# Altium PCB solder_glitcher.PcbDoc
Units mil, origin at the board's own origin, x right, y up, seen from the top; angles counter-clockwise.
Board outline 5000 x 4000 mil, 2 copper layers (Top Layer, Bottom Layer); 72 components, 60 nets, 315 pads, 5 vias.
Unrouted connection lines stored in the file: 2.
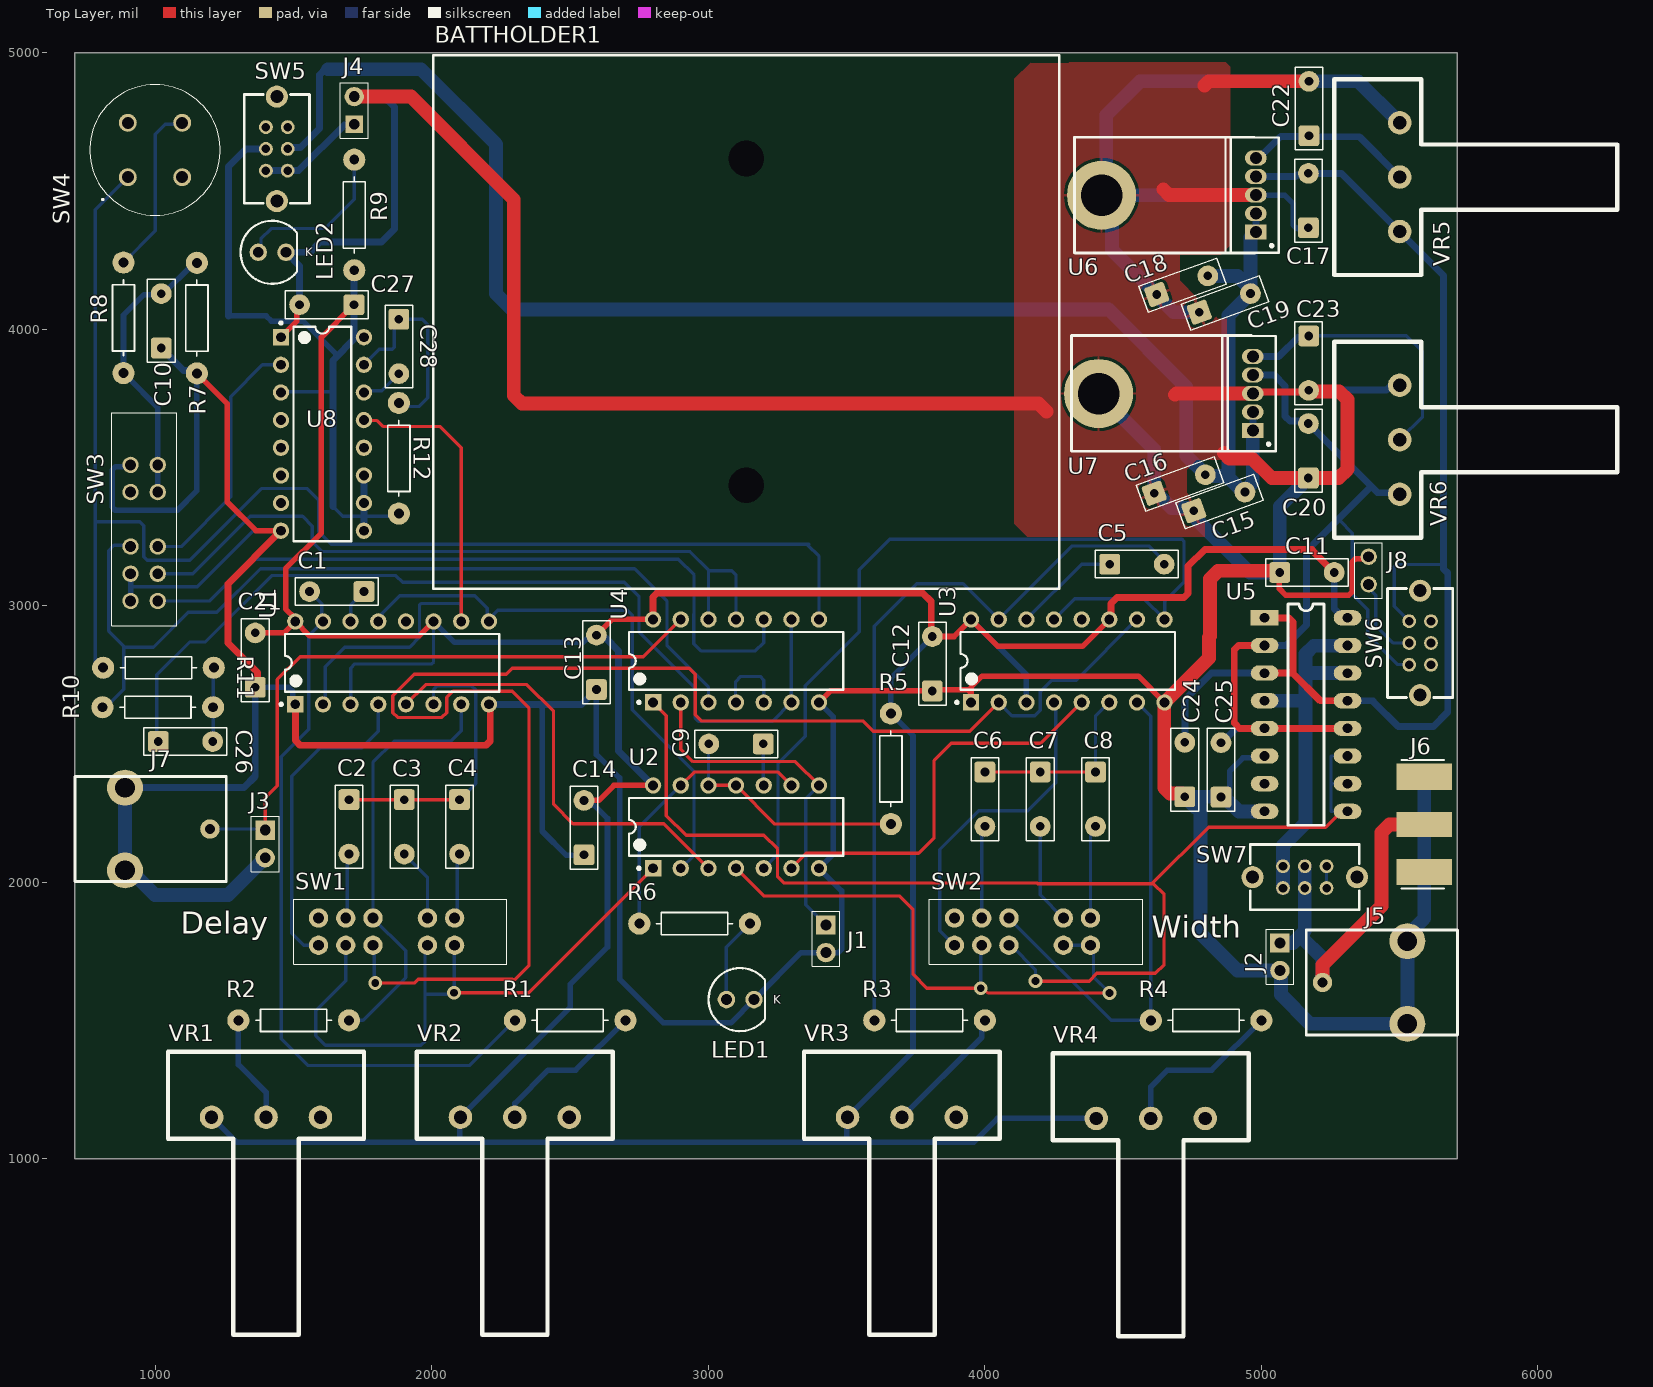
[diagram p0: Top Layer view]
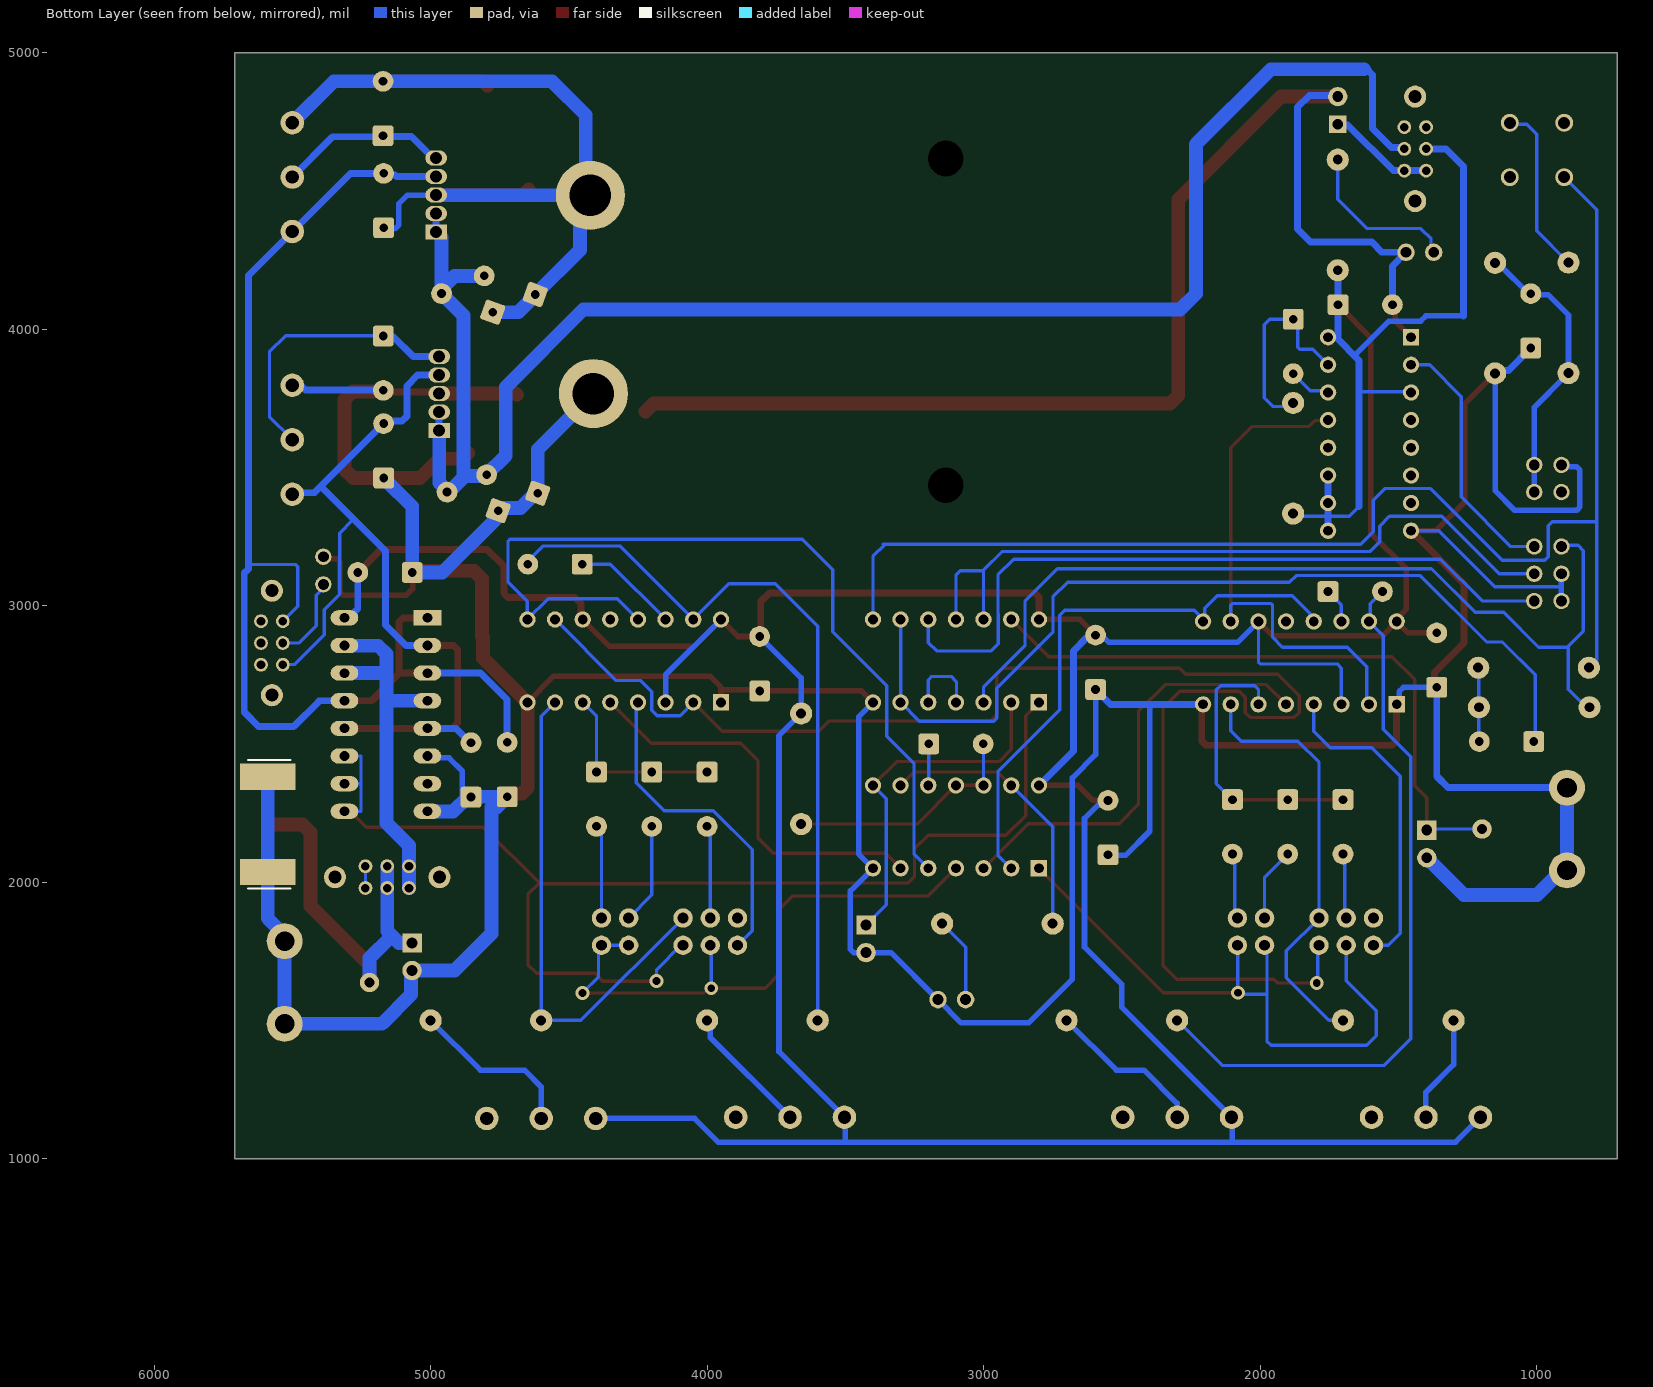
[diagram p1: Bottom Layer view, seen from below]
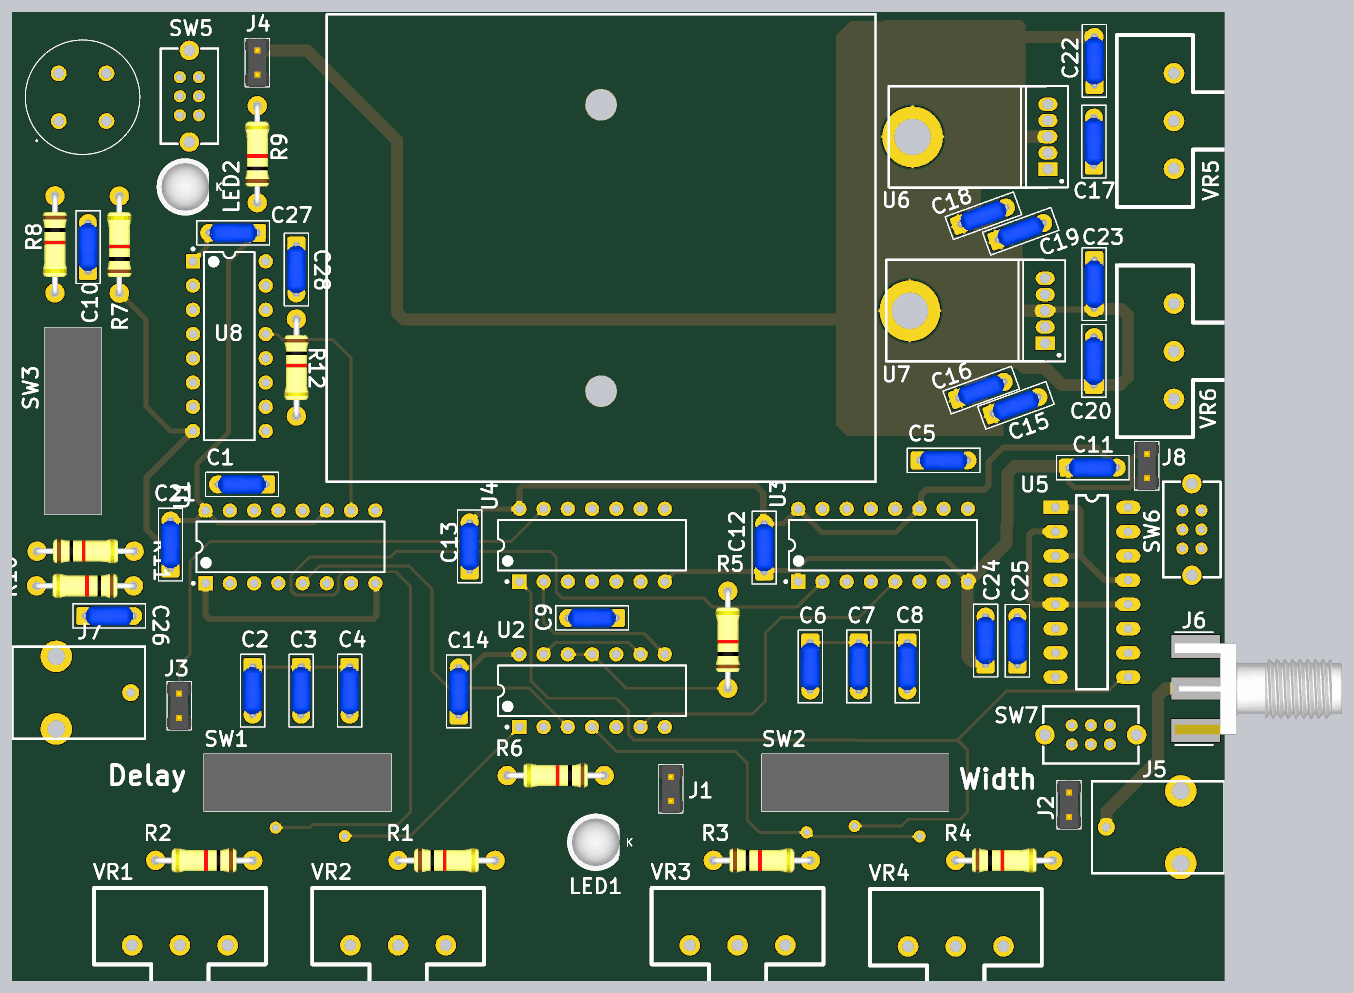
[diagram p2: 3D render of the assembled board from above, using the file's embedded part models]

## Layer stack, top to bottom
Top Solder: solder mask 0.4, Solder Resist, Dk 3.5
Top Layer: signal copper 1.4
Dielectric 1: dielectric 12.6, FR-4, Dk 4.8
Bottom Layer: signal copper 1.4
Bottom Solder: solder mask 0.4, Solder Resist, Dk 3.5

## Board outline
707.87,1000 5707.87,1000 5707.87,5000 707.87,5000

## Design rules (kind name [scope] priority, off if disabled: settings)
BoardOutlineClearance Silk_to_Outline [(OnLayer('Top Overlay'))] p1: gap=0 ignorepadtopadclearanceinfootprint=FALSE
BoardOutlineClearance [All] p2: gap=20 ignorepadtopadclearanceinfootprint=FALSE
Clearance Clearance_Power [InNet('+*') OR InNet('-*') OR InNet('GND')  OR InNet('VCC')] p1: gap=12 ignorepadtopadclearanceinfootprint=FALSE
Clearance [All] p2: gap=12 ignorepadtopadclearanceinfootprint=FALSE except(0: Arc-Hole Track-Hole SMDPad-Hole THPad-Hole Via-Hole Fill-Hole Poly-Hole Region-Hole Text-Hole)
HoleSize [All] p1: absolutevalues=TRUE maxlimit=200 minlimit=1 maxpercent=80.000 minpercent=20.000
MinimumSolderMaskSliver [All] p1: minsoldermaskwidth=5
PlaneConnect PlaneConnect_viaDirect [IsVia] p1: planeconnectstyle=Direct reliefexpansion=20 reliefentries=4 reliefconductorwidth=10 reliefairgap=10
PlaneConnect [All] p2: planeconnectstyle=Relief reliefexpansion=20 reliefentries=4 reliefconductorwidth=10 reliefairgap=10
PolygonConnect PolygonConnect_viaDirect [All vs isVia] p1: connectstyle=Direct reliefconductorwidth=10 reliefentries=4 polygonreliefangle="90 Angle" airgapwidth=10
PolygonConnect [All] p2: connectstyle=Relief reliefconductorwidth=10 reliefentries=4 polygonreliefangle="90 Angle" airgapwidth=10
RoutingVias [All] p1: holewidth=28 width=50 viastyle="Through Hole" minholewidth=28 minwidth=50 maxholewidth=28 maxwidth=50
SilkToSilkClearance [All] p1: silktosilkclearance=5
SilkToSolderMaskClearance [IsPad] p1: minsilkscreentomaskgap=5 clearancetoexposedcopper=TRUE
SolderMaskExpansion [All] p1: expansion=4 istentingtop=FALSE
Width Width_Power [InNet('+*') OR InNet('-*') OR InNet('GND')  OR InNet('VCC')] p1: maxlimit=100 minlimit=10 preferedwidth=20 minimp=50.000000 maximp=50.000000 favimp=50.000000
Width [All] p2: maxlimit=100 minlimit=6 preferedwidth=12 minimp=50.000000 maximp=50.000000 favimp=50.000000
25 further rules are at their usual default settings.

## Classes and differential pairs
component class inputs: C10 C26 C27 C28 J3 J7 R7 R8 R10 R11 R12 SW3 SW4 U8
component class power: C15 C16 C17 C18 C19 C20 C22 C23 J4 J8 LED2 R9 SW5 SW6 U6 U7 VR5 VR6
component class output_driver: C9 C11 C12 C13 C14 C21 C24 C25 J1 J2 J5 J6 LED1 R5 R6 SW7 U4 U5
component class delay_width: C1 C2 C3 C4 C5 C6 C7 C8 R1 R2 R3 R4 SW1 SW2 U1 U2 U3 VR1 VR2 VR3 VR4

## Components (designator, comment, footprint, x,y, rotation, side; value= is the part's Value field where it differs from the comment)
BATTHOLDER1 "Comment" MPD_AAHOLDER_BC3AAW 3137,4026 r0 top
C1 "approved sub OK" CAPC500P450250X550 1656,3051 r180 top value=22pF
C2 "approved sub OK" CAPC500P450250X550 1700,2200 r270 top value=330pF
C3 "approved sub OK" CAPC500P450250X550 1900,2200 r270 top value=10nF
C4 "approved sub OK" CAPC500P450250X550 2100,2200 r270 top value=330nF
C5 "approved sub OK" CAPC500P450250X550 4550,3150 r0 top value=22pF
C6 "approved sub OK" CAPC500P450250X550 4000,2300 r270 top value=330pF
C7 "approved sub OK" CAPC500P450250X550 4200,2300 r270 top value=10nF
C8 "approved sub OK" CAPC500P450250X550 4400,2300 r270 top value=330nF
C9 "approved sub OK" CAPC500P450250X550 3100,2500 r180 top value=470nF
C10 "approved sub OK" CAPC500P450250X550 1021,4030 r90 top value=1nF
C11 "approved sub OK" CAPC500P450250X550 5165,3120 r0 top value=100nF
C12 "approved sub OK" CAPC500P450250X550 3810,2790 r90 top value=100nF
C13 "approved sub OK" CAPC500P450250X550 2595,2795 r90 top value=100nF
C14 "approved sub OK" CAPC500P450250X550 2550,2197 r90 top value=100nF
C15 "approved sub OK" CAPC500P450250X550 4848,3377 r20 top value=100n
C16 "approved sub OK" CAPC500P450250X550 4705,3440 r20 top value=6u8
C17 "approved sub OK" CAPC500P450250X550 5170,4465 r90 top value=2u2
C18 "approved sub OK" CAPC500P450250X550 4714,4159 r20 top value=100n
C19 "approved sub OK" CAPC500P450250X550 4868,4095 r20 top value=6u8
C20 "approved sub OK" CAPC500P450250X550 5170,3560 r90 top value=2u2
C21 "approved sub OK" CAPC500P450250X550 1361,2803 r90 top value=100nF
C22 "approved sub OK" CAPC500P450250X550 5172,4798 r90 top value=1nF
C23 "approved sub OK" CAPC500P450250X550 5171,3877 r270 top value=1nF
C24 "approved sub OK" CAPC500P450250X550 4723,2407 r90 top value=470nF
C25 "approved sub OK" CAPC500P450250X550 4854,2406 r90 top value=470nF
C26 "approved sub OK" CAPC500P450250X550 1108.52,2508.45 r0 top value=100nF
C27 "approved sub OK" CAPC500P450250X550 1619.66,4088.53 r180 top value=100nF
C28 "approved sub OK" CAPC500P450250X550 1880.37,3937.36 r270 top value=330nF
J1 "Jumper" 2x2.54mm_Header#1 3425,1845 r270 top
J2 "Jumper" 2x2.54mm_Header#1 5067,1780 r270 top
J3 "Jumper" 2x2.54mm_Header#1 1397,2188 r270 top
J4 "Jumper" 2x2.54mm_Header#2 1719,4741 r90 top
J5 "73171-3150" 73171-3150 5221,1637 r90 top
J6 "CON-SMA-PCBEDGE-003.062" CON-SMAM-PCB-EDGE062 5589,2209 r0 top
J7 "73171-3150" 73171-3150 1197,2192 r270 top
J8 "Jumper" 2x2.54mm_Header#3 5388,3077 r90 top
LED1 "151053GS03000" "Type 5mm" 3115,1575 r0 top
LED2 "151053GS03000" "Type 5mm" 1422,4278 r0 top
R1 "Carbon Film" RESTH_AXIAL-0.4 2500,1500 r0 top value=300R
R2 "Carbon Film" RESTH_AXIAL-0.4 1500,1500 r180 top value=300R
R3 "Carbon Film" RESTH_AXIAL-0.4 3800,1500 r0 top value=300R
R4 "Carbon Film" RESTH_AXIAL-0.4 4800,1500 r0 top value=300R
R5 "Carbon Film" RESTH_AXIAL-0.4 3660,2410 r90 top value=220K
R6 "Carbon Film" RESTH_AXIAL-0.4 2950,1850 r180 top value=330R
R7 "Carbon Film" RESTH_AXIAL-0.4 1150,4039.98 r90 top value=220K
R8 "Carbon Film" RESTH_AXIAL-0.4 884.48,4041.01 r270 top value=1K
R9 "Carbon Film" RESTH_AXIAL-0.4 1719,4413 r90 top value=330R
R10 "Carbon Film" RESTH_AXIAL-0.4 1008.48,2632.5 r180 top value=220K
R11 "Carbon Film" RESTH_AXIAL-0.4 1011,2775.48 r0 top value=220K
R12 "Carbon Film" RESTH_AXIAL-0.4 1880.48,3533 r270 top value=22K
SW1 "SS-24E06-TG 5 (P)" CK_SS24E06TG5P#1 1500,1700 r0 top
SW2 "SS-24E06-TG 5 (P)" CK_SS24E06TG5P#1 3800,1700 r0 top
SW3 "SS-24E06-TG 5 (P)" CK_SS24E06TG5P#2 1079.99,2927 r90 top
SW4 "D6C50F1LFS" D6C50F1LFS 900,4549.5 r90 top
SW5 "EG2207" EG2207 1439,4652 r90 top
SW6 "EG2207" EG2207 5574,2865 r90 top
SW7 "EG2207" EG2207 5157,2018 r180 top
U1 "SN74AHC123AN" N0016A 1856,2793 r90 top
U2 "SN74HC02N" N0014A 3100,2200 r90 top
U3 "SN74AHC123AN" N0016A 4300,2800 r90 top
U4 "SN74HC14N" N0014A 3100,2800 r90 top
U5 "MAX4619" DIP16 5011.52,2956.02 r0 top
U6 "MCP1825-ADJE/AT" TO-220-AT5 4980,4485 r90 top
U7 "MCP1825-ADJE/AT" TO-220-AT5 4969,3767 r90 top
U8 "SN74AHC123AN" N0016A 1603.93,3621 r0 top
VR1 "20K" RES_PDB18 1400,1150 r0 top
VR2 "20K" RES_PDB18 2300,1150 r0 top
VR3 "20K" RES_PDB18 3700,1150 r0 top
VR4 "20K" RES_PDB18 4600,1145.28 r0 top
VR5 "20K" RES_PDB18 5500,4550 r90 top
VR6 "20K" RES_PDB18 5500,3600 r90 top

## Footprints (in the part's own frame and the unit in brackets; to place one, negate y for a bottom-side part, rotate by r counter-clockwise, add the part's x,y. Pads: shape width x height; smd on the part's side, far side on the other; paste and mask are expansions set on the pad)
2x2.54mm_Header#1 [mil]
  rect 70x70 hole 39.37: 1(0,0)
  round 70 hole 39.37: 2(100,0)
  silkscreen extent -50,-50 150,50, body extent -50,-50 150,50, height 374
2x2.54mm_Header#2 [mil]
  rect 63x63 hole 39.37: 1(0,0)
  round 70 hole 39.37: 2(100,0)
  silkscreen extent -50,-50 150,50, body extent -50,-50 150,50, height 374
2x2.54mm_Header#3 [mil]
  round 59.06 hole 39.37: 1(0,0) 2(100,0)
  silkscreen extent -50,-50 150,50, body extent -50,-50 150,50, height 374
73171-3150 [mil]
  round 70 hole 36: 1(0,0)
  round 130 hole 71: 2(-149.5,-307) 3(149.5,-307)
  silkscreen extent -190,-488 190,59
CAPC500P450250X550 [mil] "TDK FK24 radial ceramic capacitor"
  round 20 on Mech15: 0(0,0)
  rrect25% 75x75 hole 31.5: 1(-98.43,0)
  round 75 hole 31.5: 2(98.43,0)
  silkscreen extent -150,-50 150,50, body extent -110,-39 110,39, height 215
CK_SS24E06TG5P#1 [mil]
  round 70 hole 39.37: 1(90,170) 2(188.43,170) 3(286.85,170) 4(483.7,170) 5(582.13,170) 6(90,71.57) 7(188.43,71.57) 8(286.85,71.57) 9(483.7,71.57) 10(582.13,71.57)
  silkscreen extent -1,3 771,239, body extent -1,3 771,239, height 402
CK_SS24E06TG5P#2 [mil]
  round 59.06 hole 39.37: 1(90,170) 2(188.43,170) 3(286.85,170) 4(483.7,170) 5(582.13,170) 6(90,71.57) 7(188.43,71.57) 8(286.85,71.57) 9(483.7,71.57) 10(582.13,71.57)
  silkscreen extent -1,3 771,239, body extent -1,3 771,239, height 402
CON-SMAM-PCB-EDGE062 [mm] "Connector, SMA Edge Mount for 0.062\" Thick Board, 5-Lead"
  rect 5.08x2.29 smd: 1(0,0)
  rect 5.08x2.415 smd: 2(0,-4.383) 5(0,4.383)
  rect 5.08x2.415 smd far side: 3(0,-4.383) 4(0,4.383)
  silkscreen extent -2.1,-5.9 1.8,5.9, body extent -2.15,-4.8 15.3,4.72, height 4.34
D6C50F1LFS [mm]
  round 1.65 hole 1.1: 1(0,0) 2(0,-5) 3(5,-5) 4(5,0)
  silkscreen extent -3.5,-8.5 8.5,3.5
DIP16 [mil]
  rect 100x55 hole 35: 1(0,0)
  oval 100x55 hole 35: 2(0,-100) 3(0,-200) 4(0,-300) 5(0,-400) 6(0,-500) 7(0,-600) 8(0,-700) 9(300,-700) 10(300,-600) 11(300,-500) 12(300,-400) 13(300,-300) 14(300,-200) 15(300,-100) 16(300,0)
  silkscreen extent 85,-750 215,50
EG2207 [mil]
  round 50 hole 31: 1(-78.74,39.37) 2(0,39.37) 3(78.74,39.37) 4(-78.74,-39.37) 5(0,-39.37) 6(78.74,-39.37)
  round 80 hole 47: MH1(-188.98,0) MH2(188.98,0)
  silkscreen extent -197,-118 197,118
MPD_AAHOLDER_BC3AAW [mm]
  round 0 hole 3.3: MH1(0,-15) MH1(0,15)
  silkscreen extent -28.75,-24.5 28.75,24.5
N0014A [mm] "DIP, 14-Leads, Body 19.7x6.6mm, Pitch 2.54mm"
  rect 1.5x1.5 hole 0.9: 1(-3.81,7.62)
  round 1.5 hole 0.9: 2(-3.81,5.08) 3(-3.81,2.54) 4(-3.81,0) 5(-3.81,-2.54) 6(-3.81,-5.08) 7(-3.81,-7.62) 8(3.81,-7.62) 9(3.81,-5.08) 10(3.81,-2.54) 11(3.81,0) 12(3.81,2.54) 13(3.81,5.08) 14(3.81,7.62)
  silkscreen extent -3.93,-9.85 2.65,9.85, body extent -3.95,-9.85 3.95,9.85, height 5.08
N0016A [mm] "DIP, 16-Leads, Body 19.7x6.6mm, Pitch 2.54mm"
  rect 1.5x1.5 hole 0.9: 1(-3.81,8.89)
  round 1.5 hole 0.9: 2(-3.81,6.35) 3(-3.81,3.81) 4(-3.81,1.27) 5(-3.81,-1.27) 6(-3.81,-3.81) 7(-3.81,-6.35) 8(-3.81,-8.89) 9(3.81,-8.89) 10(3.81,-6.35) 11(3.81,-3.81) 12(3.81,-1.27) 13(3.81,1.27) 14(3.81,3.81) 15(3.81,6.35) 16(3.81,8.89)
  silkscreen extent -3.93,-9.85 2.65,10.31, body extent -3.95,-9.85 3.95,9.85, height 5.08
RES_PDB18 [mil]
  round 85 hole 48: 1(-196.85,0) 2(0,0) 3(196.85,0)
  silkscreen extent -354,-787 354,236
RESTH_AXIAL-0.4 [mil]
  round 80 hole 36: 1(-200,0) 2(200,0)
  silkscreen extent -138,-40 138,40, body extent -212,-50 212,50, height 102
TO-220-AT5 [mm] "TO, Thru-Hole, Vertical, Heatsink Mounted; 5 In-Line Leads; Pitch 1.70 mm"
  rect 1.4x2 hole 1.1: 1(-3.4,0)
  oval 1.4x2 hole 1.1: 2(-1.7,0) 3(0,0) 4(1.7,0) 5(3.4,0)
  silkscreen extent -5.3,-2.1 5.3,2.8, body extent -5.35,-2.15 5.35,2.85, height 19.6
"Type 5mm" [mm] "THT, LED-5mm, 2pin- Body 5.8mm"
  round 1.6 hole 1: 1(1.27,0) 2(-1.27,0)
  silkscreen extent -2.9,-2.9 2.29,2.9, body extent -2.9,-2.9 2.5,2.9, height 11.7

## Part data
BATTHOLDER1: library part FIDU-ROUND-1.0MM
C1 C2 C3 C4 C5 C6 C7 C8 C10 C11 C12 C13 C14 C15 C16 C17 C18 C19 C20 C21 C22 C23 C26 C27 C28: library part CAPR_220n_Radial_5mm, "Capacitor Ceramic 220nF 10% 50V X7R radial 5mm lead spacing", Manufacturer 1="TDK Corporation", Operating Temperature="-55°C ~ 125°C", Package / Case="0.217\" L x 0.177\" W (5.50mm x 4.50mm) radial 5mm LS", Ratings="50V; X7R", Tolerance=±10%, ComponentLink1Description="e4941_fk datasheet", ComponentLink1URL=http://www.tdk.co.jp/tefe02/e4941_fk.pdf, Material=ceramic, SCDType=spec, Supplier 1=Digi-Key
C9 C24 C25: library part CAPR_220n_Radial_5mm, "Capacitor Ceramic 100nF 10% 50V X7R radial 5mm lead spacing", Manufacturer 1="TDK Corporation", Operating Temperature="-55°C ~ 125°C", Package / Case="0.217\" L x 0.177\" W (5.50mm x 4.50mm) radial 5mm LS", Ratings="50V; X7R", Tolerance=±10%, ComponentLink1Description="e4941_fk datasheet", ComponentLink1URL=http://www.tdk.co.jp/tefe02/e4941_fk.pdf, Material=ceramic, SCDType=spec, Supplier 1=Digi-Key
J1 J2 J3 J4 J8: library part 2_PIN_JUMPER, "1x2 2.54mm header, male pins", Manufacture 1=Harwin, Manufacture Part Number 1=M20-9990246, Supplier Part Number 1=952-2262-ND, Component Group="PCB Feature", Component Type=Standard, Mounting Technology=Through-hole, Part Number=2_PIN_JUMPER, Pin Count=2, PP Material Stack=0, PP Rotation=0, RoHS=Yes, Supplier 1=Digi-Key
J5 J7: library part CON-BNC-CHEAP, "Molex Cheap R/A BNC", Manufacture 1=Molex, Component Group=Connector, Component Type=Standard, Manufacture Part Number 1=73171-3150, Part Number=CON-BNC-CHEAP, Pin Count=3, PP Material Stack=0, PP Rotation=0, Supplier 1=Digi-Key
J6: "SMA Female Edge Mount Connector for 0.062\" Thick Board", Component Group=Connector, Component Type=Standard, ComponentLink1Description="Manufacturer URL", ComponentLink1URL=http://www.linxtechnologies.com/, ComponentLink2Description=Datasheet, ComponentLink2URL=http://www.connectorcity.com/diagrams/SMA/CONSMA003.062.pdf, Part Number=CON-SMA-PCBEDGE-003.062, Pin Count=5
LED1 LED2: library part CMP-1489-00005-1, "THT LED round mono-color waterclear, WL-TMRW, Green", Emitting color=Green, Manufacturer="Wuerth Elektronik", ComponentLink1Description="Manufacturer URL", ComponentLink1URL=http://www.we-online.com, ComponentLink2Description=Datasheet, ComponentLink2URL=http://katalog.we-online.de/pbs/datasheet/7448042001.pdfhttp://katalog.we-online.de/pbs/datasheet/7448042001.pdfhttp://katalog.we-online.de/pbs/datasheet/7448042001.pdfhttp://katalog.we-online.de/pbs/datasheet/151053GS03000.pdf, PackageReference="Type 5mm", PartNumber=151053GS03000
R1 R2 R3 R4 R7 R8 R10 R11 R12: library part RES_220R_Axial_0.25W_5%, "Resistor THD Axial 220 Ohm 0.25W 5% Carbon Film", Manufacturer 1=Yageo, Manufacturer Part Number 1=CFR-25JB-220R, Package / Case=Axial, Ratings=1/4W, Supplier Part Number 1=220QBK-ND, Tolerance=±5%, SCDType=spec, Supplier 1=Digi-Key
R5 R6 R9: library part RES_220R_Axial_0.25W_5%, "Resistor THD Axial 10K Ohm 0.25W 5% Carbon Film", Manufacturer 1=Yageo, Manufacturer Part Number 1=CFR-25JB-220R, Package / Case=Axial, Ratings=1/4W, Supplier Part Number 1=220QBK-ND, Tolerance=±5%, SCDType=spec, Supplier 1=Digi-Key
SW1 SW2 SW3: library part SS24E06TG5P, "2P4T Slide, C&K Through Hole", Manufacture 1="C&K Components", Supplier Part Number 1=CKN10394-ND, Component Group=Switch, Component Type=Standard, Manufacture Part Number 1="SS-24E06-TG 5 (P)", Part Number=SS24E06TG5P, Pin Count=10, PP Material Stack=0, PP Rotation=0, Supplier 1=Digi-Key
SW4: "Switch", Manufacturer_Name="C & K COMPONENTS", Mouser Part Number=611-D6C50F1LFS, Datasheet Link=https://componentsearchengine.com/Datasheets/1/D6C50F1LFS.pdf, Height=9.8mm, Manufacturer_Part_Number=D6C50F1LFS, Mouser Price/Stock=https://www.mouser.com/Search/Refine.aspx?Keyword=611-D6C50F1LFS
SW5 SW6 SW7: "DPDT Switch with 2 MH", Manufacture 1=E-Switch, Supplier Part Number 1=EG1940-ND, Component Group=Switch, Component Type=Standard, Manufacture Part Number 1=EG2207, Mounting Technology=Through-hole, Part Number=EG2207, Pin Count=8, PP Material Stack=0, PP Rotation=0, RoHS=Yes, Supplier 1=Digi-Key
U1 U3 U8: library part CMP-1629-00116-2, "Dual Retriggerable Monostable Multivibrators, N0016A, TUBE", F @ Nom Voltage(Max)(Mhz)=110, Generic Part Number=SN74AHC123A, ICC @ Nom Voltage(Max)(mA)=0.04, Manufacturer="Texas Instruments", Operating Temperature Range(C)="-40 to 85", Rating=Catalog, tpd @ Nom Voltage(Max)(ns)=29.5,17, Voltage(Nom)(V)=3.3,5, Bits(#)=2, Code_JEDEC=MS-001, DatasheetVersion=SCLS352H, Input Type=LVTTL/CMOS, Output Drive (IOL/IOH)(Max)(mA)=50/-50, Output Type=CMOS, PackageReference=N0016A, Schmitt Trigger=No, Technology Family=AHC, VCC(Max)(V)=5.5, VCC(Min)(V)=2
U2: library part CMP-0806-00198-3, "Quadruple 2-Input Positive-NOR Gates, N0014A, TUBE", F @ Nom Voltage(Max)(Mhz)=70, Generic Part Number=SN74HC02, ICC @ Nom Voltage(Max)(mA)=0.02, Manufacturer="Texas Instruments", Operating Temperature Range(C)="-40 to 85", Rating=Catalog, tpd @ Nom Voltage(Max)(ns)=23, Voltage(Nom)(V)=5, Bits(#)=4, Code_JEDEC=MS-001, DatasheetVersion=SCLS076E, Input Type=CMOS, Output Drive (IOL/IOH)(Max)(mA)=4/-4, Output Type=CMOS, PackageReference=N0014A, PackageVersion=http://www.ti.com/lit/ml/mpdi002c/mpdi002c.pdf, VCC(Max)(V)=6, VCC(Min)(V)=2
U4: library part CMP-1615-00889-3, "Hex Schmitt-Trigger Inverters, N0014A, TUBE", F @ Nom Voltage(Max)(Mhz)=20, Generic Part Number=SN74HC14, ICC @ Nom Voltage(Max)(mA)=0.02, Manufacturer="Texas Instruments", Operating Temperature Range(C)="-40 to 85", Rating=Catalog, tpd @ Nom Voltage(Max)(ns)=31, Voltage(Nom)(V)=5, Bits(#)=6, Code_JEDEC=MS-001, DatasheetVersion=SCLS085G, Input Type=CMOS, Output Drive (IOL/IOH)(Max)(mA)=-4/4, Output Type=CMOS, PackageReference=N0014A, Schmitt Trigger=Yes, Technology Family=HC, VCC(Max)(V)=6, VCC(Min)(V)=2
U5: "Analog Mux", Manufacture 1=Maxim, Component Group="Analog IC", Component Type=Standard, Manufacture Part Number 1=MAX4619, Part Number=MAX4619, Pin Count=16, PP Material Stack=0, PP Rotation=0
U6 U7: library part CMP-0136-01019-1, "500 mA, Low Voltage, Low Quiescent Current LDO Regulator, 5-Pin TO-220, Extended Temperature", DatasheetVersion="revB, Feb-2008", PackageDescription="5-Lead Plastic Transistor Outline (AT) [TO-220]", PackageReference=TO-220-AT5, PackageVersion="revBB, Aug-2009"
VR1 VR2 VR3 VR4 VR5 VR6: library part POT_PDB181, "POT 1/5W CARBON LINEAR VAR RESISTOR", Manufacture 1=Bourns, Manufacture Part Number 1=PDB181-K420K-203B, Component Group=Resistor, Component Type=Standard, Part Number=POT_PDB181, Pin Count=3, PP Material Stack=0, PP Rotation=0

## Free pads (board coordinates)
  round 250 hole 150: MH2(4411,3767) MH2(4422,4484)

## Via types
v1: diameter 50, hole 28, Top Layer to Bottom Layer, 5 vias

## Nets (pads, with @x,y where several pads share a name; then routed paths per layer and width w, separated by ;. In a path a pad name is that pad's centre, name@x,y a point inside that pad or via, vN(x,y) a via of type N, cw(c..) or ccw(c..) an arc to the next point about the centre after c; other vN are vias at no path point)
GND: C10.1 C11.1 C12.1 C13.1 C14.1 C15.1 C16.1 C17.1 C18.1 C19.1 C20.1 C21.1 C22.2 C23.2 C24.1 C25.1 C27.2 J1.2 J2.2 J3.2 J4.2 J5.2 J5.3 J6.2 J6.3 J6.4 J6.5 J7.2 J7.3 J8.2 LED1.1 LED2.1 pad.MH2 R7.1 SW3.1 SW3.2 SW3.5 U1.1 U1.8 U2.7 U3.1 U3.8 U4.7 U5.6 U5.8 U6.3 U7.3 U8.1 U8.8 VR5.3 VR6.3 | length 27877.1
  Top Layer w20: R7.1 1260,3729.98 1260,3374 1363,3271 1443,3271 1448.46,3265.54 U8.8@1453,3261 ; U8.1 1510.71,4027.78 1510.71,4067.71 C27.2@1523,4080 ; U4.7 3441.57,2691.57 C12.1 3814.43,2696 3938,2696 3950,2684 ; U3.1 3950,2684 ; U3.8 4555,2745 3990,2745 3950,2705 3950,2684 ; U7.3 4974.79,3772.79 5165.21,3772.79 5173.79,3772.79 5176,3775 C23.2@5180,3779 ; C11.1@5065,3119 5065,3061 5088,3038 5316.28,3038 5328,3049.72 5328,3157.81 5339.72,3169.53 5380.53,3169.53 J8.2
  Top Layer w25: C21.1@1365,2707 1369,2711 1369,2758 1262,2865 1262,3079.07 1448.46,3265.54 U8.8 ; U1.1 1506,2512 1523,2495 2196.36,2495 2211,2509.64 2211,2641 U1.8@2212,2642 ; U7.3@4981,3766 4987.76,3772.76 C23.2@5165.19,3772.76 ; C23.2@5165.21,3772.79 5167.71,3775.29 C23.2
  Top Layer w50: J4.2 1924,4841 2296,4469 2296,3760.29 2325.29,3731 4194,3731 4223,3702 ; 4645,4506 4666,4485 U6.3 ; 4688,3763 4692,3767 U7.3 ; C24.1@4721,2312 4711.93,2321.07 4668.71,2321.07 4648.5,2341.29 4648.5,2648.5 U3.8 4810,2810 4810,2885 4814,2889 4814,3096.71 4843.29,3126 C11.1@5060,3126 ; 4794,4881 4809.43,4896.43 C22.2 ; 4864,3552 4885,3531 4968,3531 5037.43,3461.57 C20.1 5279.57,3461.57 5311,3493 5311,3745.71 5281.71,3775 5176,3775 5168,3775 5167.71,3775.29 C23.2@5167,3776
  Bottom Layer w12: 909,3071 909.99,3070.01 912.1,3067.9 1150.9,3067.9 1354,3271 U8.8
  Bottom Layer w20: SW3.2 909.99,3070.01 SW3.1 909.99,3014.01 SW3.1@917,3007 ; SW3.5@919,3503 856,3503 843,3490 843,3356.72 854.72,3345 1079,3345 1150,3416 R7.1 ; C21.1 1481.43,2704.57 1497,2689 1497,2653 U1.1@1502,2648 ; C27.2@1510,4076 C27.2@1510.71,4075.29 ; 2389,2642 2399,2632 2399,2184 2486.43,2096.57 C14.1@2548,2096.57 ; C13.1 2595,2461 2679,2377 2679,1649 2837,1491 3081,1491 LED1.1 ; LED1.1@3170,1580 3335,1745 J1.2 3470,1745 3482,1757 3482,1968 U2.7 3452,2102 3452,2598 U4.7 ; C25.1@4885,2301 4885,2401 4933.33,2449.33 5004.82,2449.33 U5.6 ; U6.3 5084,4485 5115,4454 5115,4376.72 5126.72,4365 5131,4365 C17.1@5133,4363
  Bottom Layer w25: J7.2@931,2335 938,2342 1320,2342 1361,2383 C21.1 ; C10.1 1102.07,3850.51 1156.49,3850.51 R7.1@1166,3841 ; LED2.1 LED2.1@1475,4278 ; LED2.1@1475,4287 LED2.1@1475,4278 ; C27.2 1521.23,4228.77 1475,4275 LED2.1@1475,4278 ; J4.2@1740,4841 1744,4845 1822,4845 1864,4803 1864,4362 1817,4315 1596,4315 1559,4278 LED2.1@1475,4278 ; U1.8 2541.43,2643 2590,2691.57 C13.1@2590,2698 ; C23.2@5165,3776 C23.2@5166,3777 ; C23.2@5177,3779.57 5452.57,3779.57 VR6.3@5472,3799
  Bottom Layer w50: J7.3@881,2020 886.86,2025.86 925.63,2025.86 998.49,1953 1262,1953 J3.2 ; J7.3 890,2329 J7.2@914,2353 ; pad.MH2@4425,3748 4430,3748 4612.51,3565.49 C16.1 4622.6,3406.34 4675.26,3353.67 4746.33,3353.67 C15.1@4747,3353 ; pad.MH2@4439,4467 4439,4774 4561.43,4896.43 C22.2 5350.42,4896.43 5493.85,4753 VR5.3@5497,4753 ; pad.MH2@4445,4468 4460.27,4452.73 4460.27,4286.58 C18.1 ; pad.MH2@4455,4499 4469.5,4484.5 4979.5,4484.5 U6.3 ; C18.1@4629,4114 4681.66,4061.34 C19.1 ; C24.1@4718,2303 4728.57,2303 4761.86,2269.71 4780,2269.71 4780,1814 4914,1680 J2.2 5070.83,1676.17 5070.83,1593.17 5176.5,1487.5 5503.5,1487.5 J5.2@5526,1465 ; C24.1 4865.43,2308.57 4919,2255 U5.8@4987,2255 ; C15.1@4750,3328 4760.76,3328 4765.85,3322.91 4765.85,3312.15 4958,3120 C11.1 5066.57,3358.15 5161.43,3453 C20.1@5164,3453 ; J5.3@5516,1796 5516,1796.15 5589,1869.15 J6.3@5589,2010 ; J5.3 J5.2 5528,1481 J5.2@5529,1480 ; J6.4 J6.3 J6.3@5589,2010 ; J6.3@5590,2009 J6.3@5589,2010
INTERNAL_nGLITCH_OUT: SW2.8 U4.1 U5.9 U5.10 U5.11 | length 4501.8
  Top Layer w12: U4.1 2848,2602 2848,2240 2919,2169 3201,2169 3250,2120 3250,2020 3273,1997 4190,1997 4190,1994 4604,1994 4809,2199 5232,2199 5281,2248 U5.9@5298,2248 ; v1(4183,1642) 4377,1642 4405,1670 4617,1670 4648,1701 4648,1956 4609,1995 ; U5.9@5311.05,2255.55 U5.9
  Bottom Layer w12: SW2.8 4095.14,1771.57 4183,1683.71 v1(4183,1642) ; U5.9 5251.52,2256.02 5251.52,2356.02 ; U5.10 5251.52,2356.02 ; U5.11 5251.52,2456.02 5251.52,2356.02
INTERNAL_TRIG_IN: U1.2 U1.10 U8.13 | length 1878.2
  Top Layer w12: U8.13 1755.39,3669.54 1801.46,3669.54 1823,3648 2029,3648 2106,3571 2106,2964.74 2117.74,2953 U1.10@2126,2953
  Bottom Layer w12: U1.2@1608,2643 1614,2649 1614,2779 1685,2850 1919,2850 1955,2886 1955,3000.97 1962.03,3008 2098.97,3008 2106,3000.97 U1.10
NetC1_1: C1.1 U1.14 | length 124.5
  Bottom Layer w12: U1.14 1706,3002.57 1744.43,3041 C1.1@1755,3041
NetC1_2: C1.2 R1.1 U1.15 | length 2643.7
  Bottom Layer w12: C1.2@1563,3032 1576.57,3032 1601,3007.58 1601,2948 U1.15 1606,2950 U1.15@1605,2951 ; U1.15@1598,2942 1598,2935 1554,2891 1554,2553 1455,2454 1455,1433 1551,1337 2137,1337 R1.1
NetC2_1: C2.1 C3.1 C4.1 U1.6 | length 1071.7
  Top Layer w12: C2.1 C3.1 C4.1 2119.43,2298.43 C4.1@2121,2300
  Bottom Layer w12: U1.6 2006,2697 2019,2710 2143,2710 2158,2695 2158,2356.43 C4.1 2099,2297.43 C4.1@2099,2287
NetC2_2: C2.2 SW1.2 | length 246.3
  Bottom Layer w12: SW1.2 1694.21,1875.79 1694.21,2110.79 C2.2@1692,2113
NetC3_2: C3.2 SW1.4 | length 276.9
  Bottom Layer w12: C3.2@1897,2111 1897,2104.57 C3.2 1983.7,2017.87 SW1.4
NetC4_2: C4.2 SW1.5 | length 228.7
  Bottom Layer w12: SW1.5 2091.06,1878.94 2091.06,2072.47 2104.59,2086 C4.2@2108,2086
NetC5_1: C5.1 U3.14 | length 384.4
  Bottom Layer w12: U3.14 4350,3150 C5.1
NetC5_2: C5.2 R3.1 U3.15 | length 2734.9
  Bottom Layer w12: R3.1 3600,2926 3753,3079 3921,3079 U3.15 4316,3216 4592.97,3216 4648.43,3160.54 C5.2
NetC6_1: C6.1 C7.1 C8.1 U3.6 | length 672.3
  Top Layer w12: C6.1 C7.1 C8.1
  Bottom Layer w12: C8.1 4400,2600 U3.6
NetC6_2: C6.2 SW2.2 | length 343.1
  Bottom Layer w12: SW2.2 3988.43,2201.57 C6.2
NetC7_2: C7.2 SW2.4 | length 366.2
  Bottom Layer w12: C7.2 4200,1953.7 SW2.4
NetC8_2: C8.2 SW2.5 | length 349.4
  Bottom Layer w12: SW2.5 4382.13,2201.57 C8.2
NetC9_1: C9.1 U2.10 | length 152.2
  Bottom Layer w12: C9.1 3198,2499.57 3198,2350 U2.10
NetC9_2: C9.2 R5.1 U2.11 U2.12 | length 869.6
  Top Layer w12: U2.12 U2.11 3240,2210 R5.1
  Bottom Layer w12: U2.12 3000,2500 C9.2
NetC10_2: C10.2 R7.2 R8.2 SW3.9 SW3.10 | length 1021.2
  Bottom Layer w20: R8.2 884.48,4050.48 959,4125 1040,4125 C10.2@1042,4127 ; R8.2@897,3829 897,3828.49 1008.42,3717.07 SW3.10 SW3.9 ; C10.2 1029.72,4128.43 1131.3,4230 R7.2@1137,4230
NetC15_2: C15.2 C16.2 C18.2 C19.2 SW5.5 U6.1 U6.2 U7.1 U7.2 | length 6233.7
  Bottom Layer w25: SW5.5 1483.15,4656.78 1524.78,4656.78 1593,4725 1593,4920 1615,4942 ; U7.1@4968,3641 4969,3642 U7.2 ; U6.1 U6.2
  Bottom Layer w50: 1624,4940 1961,4940 2232,4669 2232,4128 2289,4071 4448,4071 4728,3791 4728,3543.15 C16.2 ; C16.2@4806,3470 4807.12,3468.88 4875.51,3468.88 4881,3463.39 ; C18.2 4913.34,4192.66 4960.49,4145.51 4960.49,4331.63 4965.63,4336.77 4965.63,4348.58 4968.19,4351.14 U6.1 ; C15.2 4933.73,3410.66 4881,3463.39 ; C15.2@4943,3402 4943,3419.94 4969,3445.94 U7.1 ; C19.2 4881,4049.17 4881,3463.39
NetC22_1: C22.1 U6.5 VR5.2 | length 632.8
  Bottom Layer w25: U6.5 4991.81,4618.86 5069.95,4697 C22.1@5192,4697 ; C22.1@5172,4696 5354,4696 VR5.2
NetC23_1: C23.1 U7.5 VR6.2 | length 1016.3
  Bottom Layer w12: C23.1@5177,3976.43 5524.57,3976.43 5583,3918 5583,3683 5503,3603 VR6.2@5503,3602
  Bottom Layer w25: U7.5 5062.86,3900.86 5134,3972 5168,3972 C23.1@5174,3978
NetC26_1: C26.1 U4.6 U4.9 | length 3379.8
  Bottom Layer w12: C26.1@1005,2497 1005,2750 1123.5,2868.5 1180.5,2868.5 1421,3109 1870,3109 1894,3085 2193,3085 2696,3085 2749,3032 2749,2904 2952.47,2700.53 2952.47,2593.53 2964,2582 3232,2582 U4.6 U4.9@3300,2949
NetC26_2: C26.2 R10.1 R11.2 | length 268.2
  Bottom Layer w12: C26.2 1208.97,2510.48 1208.97,2773.03 R11.2@1207,2775
NetC28_1: C28.1 R12.1 U8.15 | length 739
  Bottom Layer w12: U8.15 1809.93,3927 1856.97,3927 1864,3934.03 1864,4004.54 1881.46,4022 C28.1@1882,4022 ; R12.1@1873,3732 1885,3720 1953,3720 1985,3752 1985,4016 1965.21,4035.79 C28.1
NetC28_2: C28.2 U8.14 | length 137.5
  Bottom Layer w12: U8.14 1760,3777.07 1818.5,3777.07 1868,3826.57 C28.2@1868,3827
NetJ1_1: J1.1 U2.8 U4.2 | length 1279
  Top Layer w12: U4.2 2900,2480 2944,2436 3314,2436 U2.8
  Bottom Layer w12: U2.8 3352,2302 3352,1918 J1.1
NetJ2_1: J2.1 J5.1 J6.1 SW7.2 SW7.5 | length 1344.2
  Top Layer w25: J2.1@5056,1787 J2.1@5074,1787
  Top Layer w50: J5.1 5221,1701 5434,1914 5434,2179.71 5463.29,2209 J6.1
  Bottom Layer w50: J2.1@5079,1780 5114,1780 5134,1800 ; SW7.5 SW7.2 5157,1823 5134,1800 ; J5.1@5222,1646 5221.24,1646 5221,1646.24 5221,1725 5146,1800 5134,1800
NetJ3_1: J3.1 J7.1 U4.13 | length 2329.7
  Top Layer w12: J7.1@1197,2218.79 1209.79,2206 J7.1@1212,2206 ; J3.1@1389,2191 1397,2199 1397,2303 ; 1397,2305 1441,2349 1441,2733 1523,2815 2765,2815 U4.13
  Bottom Layer w12: J7.1 1379,2192 J3.1@1391,2180
NetJ4_1: J4.1 SW5.1 SW5.4 | length 379.6
  Bottom Layer w25: SW5.1 SW5.4 1518.26,4573.26 1683,4738 J4.1@1711,4738
NetJ8_1: J8.1 SW6.2 | length 320.6
  Bottom Layer w12: J8.1@5382,3088 5382,3070.27 5414,3038.27 5414,2927 5476,2865 SW6.2
NetLED1_2: LED1.2 R6.1 | length 310.2
  Bottom Layer w12: LED1.2 3065,1765 R6.1
NetLED2_2: LED2.2 R9.2 | length 613.8
  Bottom Layer w12: LED2.2 1381.76,4287.76 1381.76,4326.76 1419,4364 1613,4364 ; 1613.03,4363.97 1719,4469.94 R9.2 1719,4616 R9.2@1732,4629
NetR1_2: R1.2 VR2.2 | length 564.3
  Bottom Layer w20: VR2.2@2300,1160 2300,1200 2420,1320 2520,1320 R1.2
NetR2_1: R2.1 SW1.3 U1.7 | length 1555.4
  Bottom Layer w12: R2.1 1700.97,1500.97 1750.97,1500.97 1905,1655 1905,1751.85 SW1.3 1786.85,2432.85 1863,2509 2068,2509 2106,2547 U1.7@2106,2640
NetR2_2: R2.2 VR1.2 | length 401.4
  Bottom Layer w20: R2.2 1300,1340 1400,1240 VR1.2 VR1.2@1400,1140
NetR3_2: R3.2 VR3.2 | length 470.4
  Bottom Layer w20: VR3.2 3988.52,1438.52 3988.52,1487.52 R3.2@3998,1497
NetR4_1: R4.1 SW2.3 U3.7 | length 1837.1
  Bottom Layer w12: SW2.3 4456.85,1500 R4.1 4600,2600 U3.7
NetR4_2: R4.2 VR4.2 | length 610.4
  Bottom Layer w20: VR4.2@4580,1160 4584.7,1160 4600,1175.3 4600,1260 4660,1320 4820,1320 R4.2
NetR6_2: R6.2 U2.9 U2.13 | length 1001.9
  Top Layer w12: U2.13 2948,2398 3252,2398 U2.9
  Bottom Layer w12: R6.2 2750,2200 U2.13
NetR8_1: R8.1 SW4.3 | length 623.4
  Bottom Layer w12: R8.1 999,4355.53 999,4705 1035.03,4741.03 1088.97,4741.03 SW4.3@1094,4736
NetR10_2: R10.2 SW3.3 U4.3 | length 3273.7
  Bottom Layer w12: R10.2 820.5,2632.5 885,2697 885,2850 ; SW3.3@909,3218 850,3218 831,3199 831,2908 885,2854 885,2850 ; U4.3 3000,2706 2850,2856 2850,3016.91 2732.91,3134 1380,3134 1222,2976 1119,2976 993,2850 885,2850
NetR11_1: R11.1 SW4.1 U4.8 | length 5120.4
  Bottom Layer w12: 785,3307 789,3303 943,3303 957.52,3288.48 957.52,3176.51 970.03,3164 1124,3164 1383.47,3423.47 1473.62,3423.47 1474.14,3424 1548,3424 1591,3381 1591,3267 1618,3240 1636,3222 3363,3222 ; R11.1@815,2740 782,2773 782,3307 782,4431.5 SW4.1 ; 3358,3220 3400,3178 U4.8
NetSW1_6: SW1.6 U1.4 | length 1159.5
  Bottom Layer w12: SW1.6 1536.43,1771.57 1493,1815 1493,2383 1596,2486 1746,2486 1806,2546 U1.4@1806,2642
NetSW1_7: SW1.7 SW1.9 SW1.10 U2.1 | length 2323.7
  Top Layer w12: v1(2080,1600) 2350,1600 U2.1
  Bottom Layer w12: SW1.7 1688.43,1643.43 1580,1535 1580,1445 1615,1410 1960,1410 1975,1425 1975,1593.94 ; SW1.9 1975,1762.87 1975,1593.94 ; SW1.10 2081.06,1770.51 2081.06,1601.06 v1(2080,1600) 2073.94,1593.94 1975,1593.94
NetSW1_8: SW1.8 U3.2 U3.10 | length 5462.3
  Top Layer w12: v1@1806,1637 1808,1635 1936,1635 1950,1649 2290,1649 2291.03,1647.97 2300.97,1647.97 2351,1698 2351,2630 2290.47,2690.53 2076,2690.53 2053.53,2668.06 2053.53,2613 2036,2595.47 1876,2595.47 1858.47,2613 1858.47,2674.47 1936,2752 2268.5,2752 2290.5,2774 2930,2774 2952,2752 2952,2666 2952,2605 2974,2583 3559,2583 3596,2546 3946,2546 U3.2
  Bottom Layer w12: SW1.8 1790.92,1767.5 1790.92,1639.08 v1(1795,1635) ; U3.2 4098,2602 4180,2602 4200,2622 4200,2689 4240,2729 4329,2729 U3.10
NetSW2_6: SW2.6 U3.4 | length 1184.2
  Bottom Layer w12: SW2.6 3837,1824.57 3837,2118 3977,2258 4155,2258 4256,2359 4256,2627 4250,2627 U3.4
NetSW2_7: SW2.7 SW2.9 SW2.10 U2.4 | length 2131.4
  Top Layer w12: U2.4 3200,1950 3690,1950 3740,1900 3740,1666 3790,1616 3994.03,1616 4011.03,1599 v1(4451,1599)
  Bottom Layer w12: v1(3985,1616) 3985,1768.15 SW2.7 ; SW2.9 SW2.10 4392.73,1760.97 4392.73,1657.27 v1(4451,1599)
NetSW3_6: SW3.6 U4.10 | length 2633.4
  Bottom Layer w12: SW3.6 1197,3017 1348,3168 2891,3168 2948,3111 2948,2965 ; 2947.53,2969.69 2947.53,2861.47 2973,2836 3170,2836 3200,2866 U4.10@3200,2944
NetSW3_7: SW3.7 U4.11 U4.12 | length 2631.9
  Bottom Layer w12: SW3.7 1135.43,3115.43 1343,3323 1532,3323 1567,3288 1567,3231 1602,3196 2932,3196 2934,3194 ; 2935,3194 3000,3129 U4.12@3000,2952 ; 3002,3126 3084,3126 3100,3110 U4.11
NetSW3_8: SW3.8 U8.2 | length 921.8
  Bottom Layer w12: SW3.8 1092.85,3213.85 1272,3393 1272,3756 1387,3871 1444,3871 U8.2@1445,3872
NetSW7_1: SW7.1 SW7.4 | length 86.8
  Bottom Layer w12: SW7.1 5235.74,2053.74 SW7.4@5244,2062
NetSW7_3: SW7.3 SW7.6 U5.4 U5.14 U5.15 | length 1331.6
  Bottom Layer w50: U5.4 5149.98,2656.02 5151,2655 ; SW7.3 SW7.6 5078.26,2132.26 5160,2214 5160,2825.71 5189.36,2855.07 5305.93,2855.07 U5.15@5306,2855 ; 5161,2761 5165.98,2756.02 U5.14
NetU1_5: U1.5 U2.3 | length 1596.3
  Top Layer w12: U1.5 1977.53,2714.53 2343.47,2714.53 2440,2618 2440,2281 2510,2211 2839,2211 U2.3
NetU1_9: U1.9 U1.13 U2.2 | length 2042.8
  Bottom Layer w12: U1.13 1806,2955.73 1820.11,2969.84 1820.11,2972.11 1884,3036 2155,3036 2200.47,2990.53 2200.47,2960.53 U1.9@2204,2957 ; U1.9@2220,2965 2238,2983 2707,2983 2725,2965 2725,2623 2948,2400 2948,2098 U2.2
NetU2_5: U2.5 U3.9 U3.13 | length 3220.5
  Bottom Layer w12: U2.5 3252,2102 3252,2430 3350,2528 3350,2710 3545,2905 3545,3130 3655,3240 4712.97,3240 4720,3232.97 4720,3085 4650,3015 U3.9 4575,3025 4325,3025 U3.13
NetU2_6: U2.6 U3.5 | length 1462.5
  Top Layer w12: U2.6 3354,2104 3760,2104 3816,2160 3816,2440 3878,2502 4202,2502 U3.5
NetU4_4: U4.4 U4.5 | length 254.3
  Bottom Layer w12: U4.4@3098,2667 3098,2725 3117,2744 3187,2744 3200,2731 U4.5
VCC: C11.2 C12.2 C13.2 C14.2 C21.2 C27.1 R5.2 R9.1 R12.2 SW5.2 U1.3 U1.11 U1.16 U2.14 U3.3 U3.11 U3.16 U4.14 U5.16 U8.3 U8.9 U8.10 U8.11 U8.16 VR1.1 VR2.1 VR3.1 VR4.1 | length 17382.1
  Top Layer w20: C21.2 1464.43,2901.43 U1.16 ; C27.1@1721,4083 1712.55,4083 1600,3970.45 1600,3263 1471,3134 1471,2988.57 1506,2953.57 U1.16 ; U1.11 1954,2891 1558,2891 U1.16 ; C14.2@2555,2296 2604,2296 2658,2350 U2.14 ; C13.2 2651.57,2950 U4.14 ; C12.2 3888.43,2888.43 U3.16 4047,2853 4353,2853 U3.11 ; U5.16@5310,2954 5300.51,2954 5298.49,2956.02 U5.16
  Top Layer w25: U4.14 2800,3031.36 2814.64,3046 3775,3046 3806,3015 3806,2902 C12.2@3813,2895 ; U3.11@4454,2951 4456,2953 4456,3007 4478,3029 4720.36,3029 4735,3043.64 4735,3143 4795.36,3203.36 5184,3203.36 5184,3199.43 C11.2
  Bottom Layer w12: U8.3 1456.93,3774 1641,3774 ; U1.16@1504,2943 U1.16@1506,2941 ; 1642,3359 1677.53,3323.47 1753.93,3323.47 1870.95,3323.47 R12.2 ; U1.3 1706,2774 1721,2789 1998.97,2789 2006,2796.03 2006,2934 U1.11@2009,2937
  Bottom Layer w20: VR1.1@1208.77,1128.77 1224.38,1128.77 1293.15,1060 2100,1060 ; 1264,4048 1400,4048 1419,4029 1534,4029 1653,3910 ; U1.11 2082,2867 2547,2867 2558,2878 2564.69,2878 2579.69,2893 C13.2@2595,2893 ; C14.2@2575.4,2290.03 2575.4,2284.91 2582.61,2277.7 2587.73,2277.7 2635,2230.43 2635,1765 2500,1630 2500,1546.85 VR2.1 2100,1146.85 2100,1060 ; R5.2 3660,2738.43 C12.2 ; R5.2@3679.6,2619.6 3679.6,2590.4 3740,2530 3740,1386.85 VR3.1 3500,1146.85 3500,1060 ; U3.16 4150,2750 U3.3 ; VR4.1 4045.28,1145.28 3960,1060 3500,1060 ; 2100,1060 3500,1060
  Bottom Layer w25: 1264,4048 1264,4589 1327,4652 SW5.2 ; 1642,3359 1642,3887 1724,3969 ; C27.1 1718.08,3975.92 1723,3971 U8.16 U8.16@1763,3971 ; R9.1 1718.54,4212.54 1718.54,4073.46 C27.1@1721,4071 ; U8.11@1751,3464 1753.93,3461.07 U8.10 1753.93,3323.47 U8.9 ; C13.2@2629,2882 2675,2836 2675,2475 U2.14 ; C11.2 5263.43,2989.74 5289.16,2964 U5.16@5300,2964
VGLITCH: C20.2 C25.2 SW6.1 U5.2 U5.5 U5.12 U7.4 VR6.1 | length 3144
  Top Layer w25: U5.2@4994,2856 4916.64,2856 4902,2841.36 4902,2575 4920.98,2556.02 U5.5 U5.12 ; SW6.1 5536,2787.63 SW6.1@5536,2788
  Bottom Layer w12: 5283,3308 5329,3262 5329,3042 5385,2986 5385,2894 5491.63,2787.37 5533.52,2787.37 SW6.1
  Bottom Layer w25: C25.2@4852,2525 4857.68,2519.32 4871.77,2519.32 4908.47,2556.02 U5.5 ; U7.4 5047.07,3833.93 5086,3795 5086,3685 5103.01,3667.99 5153.01,3667.99 C20.2@5158,3663 ; U5.2 5089.02,2856.02 5163,2930 5163,3198 5393,3428 ; C20.2 5420,3408.43 5486.57,3408.43 VR6.1@5495,3400 ; VR6.1@5488.52,3378.52 VR6.1@5489,3379
VNORMAL: C17.2 C24.2 SW6.3 U5.1 U5.3 U5.13 U6.4 VR5.1 | length 4362.2
  Top Layer w25: U5.3 5112.98,2756.02 5212.98,2656.02 5302.02,2656.02 U5.13@5308,2662 ; U5.1 5099.36,2956.02 5114,2941.38 5114,2759
  Bottom Layer w12: SW6.3 5481,2997.37 5481,3141.03 5488.97,3149 5652,3149 5658,3155
  Bottom Layer w25: C24.2@4732,2511 4723,2520 4723,2660 4819.02,2756.02 U5.3 ; U6.4 5123.93,4551.93 5129,4557 5167,4557 C17.2@5173.43,4563.43 ; C17.2 C17.2@5173.43,4563.43 ; U5.13 5404.39,2656.02 ; 5404,2654 5495,2563 5622,2563 5674,2615 5674,3118 5659,3133 5659,3149 5659,4194.15 VR5.1 5289.72,4563.43 C17.2@5173.43,4563.43
pads on no net: BATTHOLDER1.MH1 C1.0 C2.0 C3.0 C4.0 C5.0 C6.0 C7.0 C8.0 C9.0 C10.0 C11.0 C12.0 C13.0 C14.0 C15.0 C16.0 C17.0 C18.0 C19.0 C20.0 C21.0 C22.0 C23.0 C24.0 C25.0 C26.0 C27.0 C28.0 SW1.1 SW2.1 SW3.4 SW4.2 SW4.4 SW5.3 SW5.6 SW5.MH1 SW5.MH2 SW6.4 SW6.5 SW6.6 SW6.MH1 SW6.MH2 SW7.MH1 SW7.MH2 U1.12 U3.12 U5.7 U8.4 U8.5 U8.6 U8.7 U8.12 VR1.3 VR2.3 VR3.3 VR4.3

## Polygon pours and split planes (outlines as drawn)
GND on Top Layer "GND_L01_P001" (solid, pour order 1): 4300,4961 4305,4966 4871,4966 4888,4949 4888,4304 4853,4269 4704,4269 4704,4176 4843,4037 4875,4037 4875,3543 4860,3528 4764,3528 4764,3526 4730,3492 4730,3408 4801,3337 4796,3332 4796,3250 4153,3250 4107,3296 4107,4905 4165,4963
no net on Top Layer "NONET_L01_P000" (solid, pour order 0): 4321,4961

## Silkscreen, mask and mechanical layers (free items; w line width, h text height)
Top Overlay:
  lines w10: 4313,3559 4313,3977 4963,3977 ; 4314.95,3558.17 4964.95,3558.17 ; 4324,4276 4324,4694 4974,4694 ; 4325.95,4275.17 4975.95,4275.17
  text "Delay" at 1092,1812.66 h80
  text "Width" at 4604,1798 h80
Mechanical 1:
  the board outline again, w15.75

## Text inside footprints (layer, text, board x,y; h text height)
LED1: Top Overlay "K" at 3235,1560 h30; Mechanical 15 "K" at 3235,1560 h30
LED2: Top Overlay "K" at 1542,4263 h30; Mechanical 15 "K" at 1542,4263 h30